# Altium PCB RX Layout.PcbDoc (part 2 of 2)
Units mm, origin at the board's own origin, x right, y up, seen from the top; angles counter-clockwise.
Board outline 88 x 80 mm, 4 copper layers (Top Layer, Mid 1, Mid 2, Bottom Layer), stack 0.603 mm thick; 110 components, 43 nets, 265 pads, 273 vias.
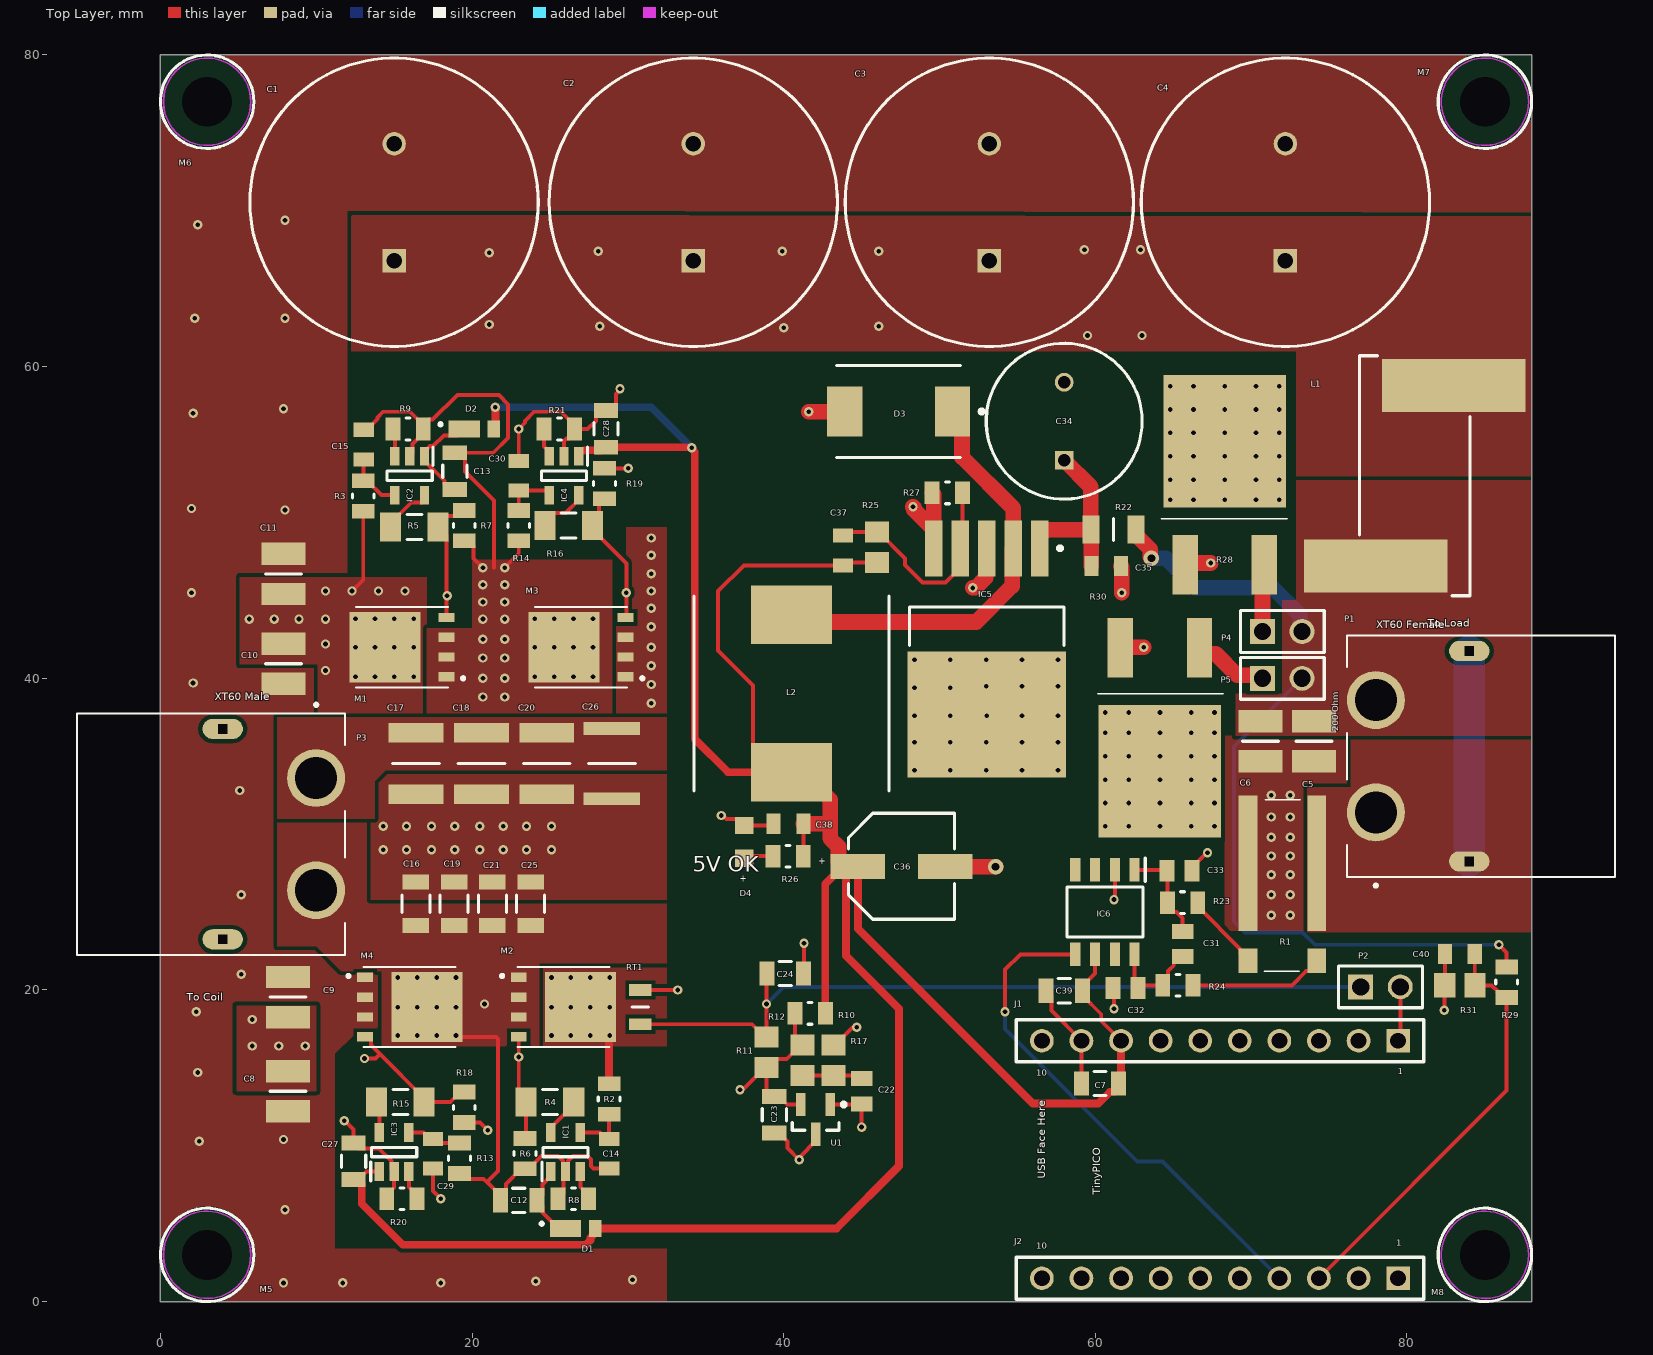
[diagram p0: Top Layer view]

## Other copper (continued)
Mid 2 (plane layer: these items are gaps in the copper):
  lines w0.25: 32.5,0 32.5,61.1 73,61.1 ; 32.5,15.4 5,15.4 5,70 77,70 77,61.1 73,61.1 ; 88,23.8 69.1,23.8 69.1,44.7 73,44.7 73,61.1 ; 13.5,27.5 13.5,37.8 16.7,37.8 16.7,48 16.9,48.2 26.4,48.2 26.5,48.1 26.5,27.6 26.4,27.5 13.5,27.5

## Silkscreen, mask and mechanical layers (free items; w line width, h text height)
Top Overlay:
  text "To Load" at 81.342,43.3 h0.5
  text "XT60 Female" at 78.025,43.2 h0.5
  text "XT60 Male" at 3.484,38.6 h0.5
  text "200 Ohm" at 75.6,36.61 h0.4 r90
  text "5V OK" at 34.167,27.6 h1
  text "To Coil" at 1.709,19.3 h0.5
  text "USB Face Here" at 56.8,7.884 h0.5 r90
  text "TinyPICO" at 60.3,6.867 h0.5 r90
Bottom Overlay:
  drawing of 6 lines, arcs and shapes, not listed
  text "IC4 GND" at 23.766,53.2 h0.5
  text "M1 Gate" at 17.375,46.5 h0.5
  text "M3 Gate" at 28.775,44.8 h0.5
  text "Between M1 and M3" at 20.224,40.8 h0.5
  text "Vout" at 82.1,40.266 h1 r90
  text "GND" at 82.1,32.733 h1 r90
  text "NOTE:  / Not Board GND" at 86.1,32.166 h0.5 r90
  text "To Coil" at 3.8,27.701 h1 r270
  text "Between M2 and M4" at 21.324,21.6 h0.5
  text "M4 Gate" at 16.375,14.6 h0.5
  text "M2 Gate" at 26.175,14.5 h0.5
  text "3.1V" at 37.633,11.9 h0.5
  text "Into U1" at 46.133,8.8 h0.5
  text "NUS" at 78.1,6.1 h1.52
  text "WPT V3.0 (HV Version) RX" at 78.176,4.322 h1.52
  text "IC3 GND" at 18.866,4 h0.5
Board Outline:
  the board outline again, w0.25

## Text inside footprints (layer, text, board x,y; h text height)
C36: Top Overlay "+" at 42.716,28.436 h0.4 r180
D4: Top Overlay "+" at 37.18,26.95 h0.4
J1: Top Overlay "1" at 79.4,14.6 h0.4; Top Overlay "10" at 56.2,14.5 h0.4
J2: Top Overlay "1" at 79.3,3.6 h0.4; Top Overlay "10" at 56.2,3.4 h0.4